# EAGLE board esquema_sgps (EAGLE 5.11)
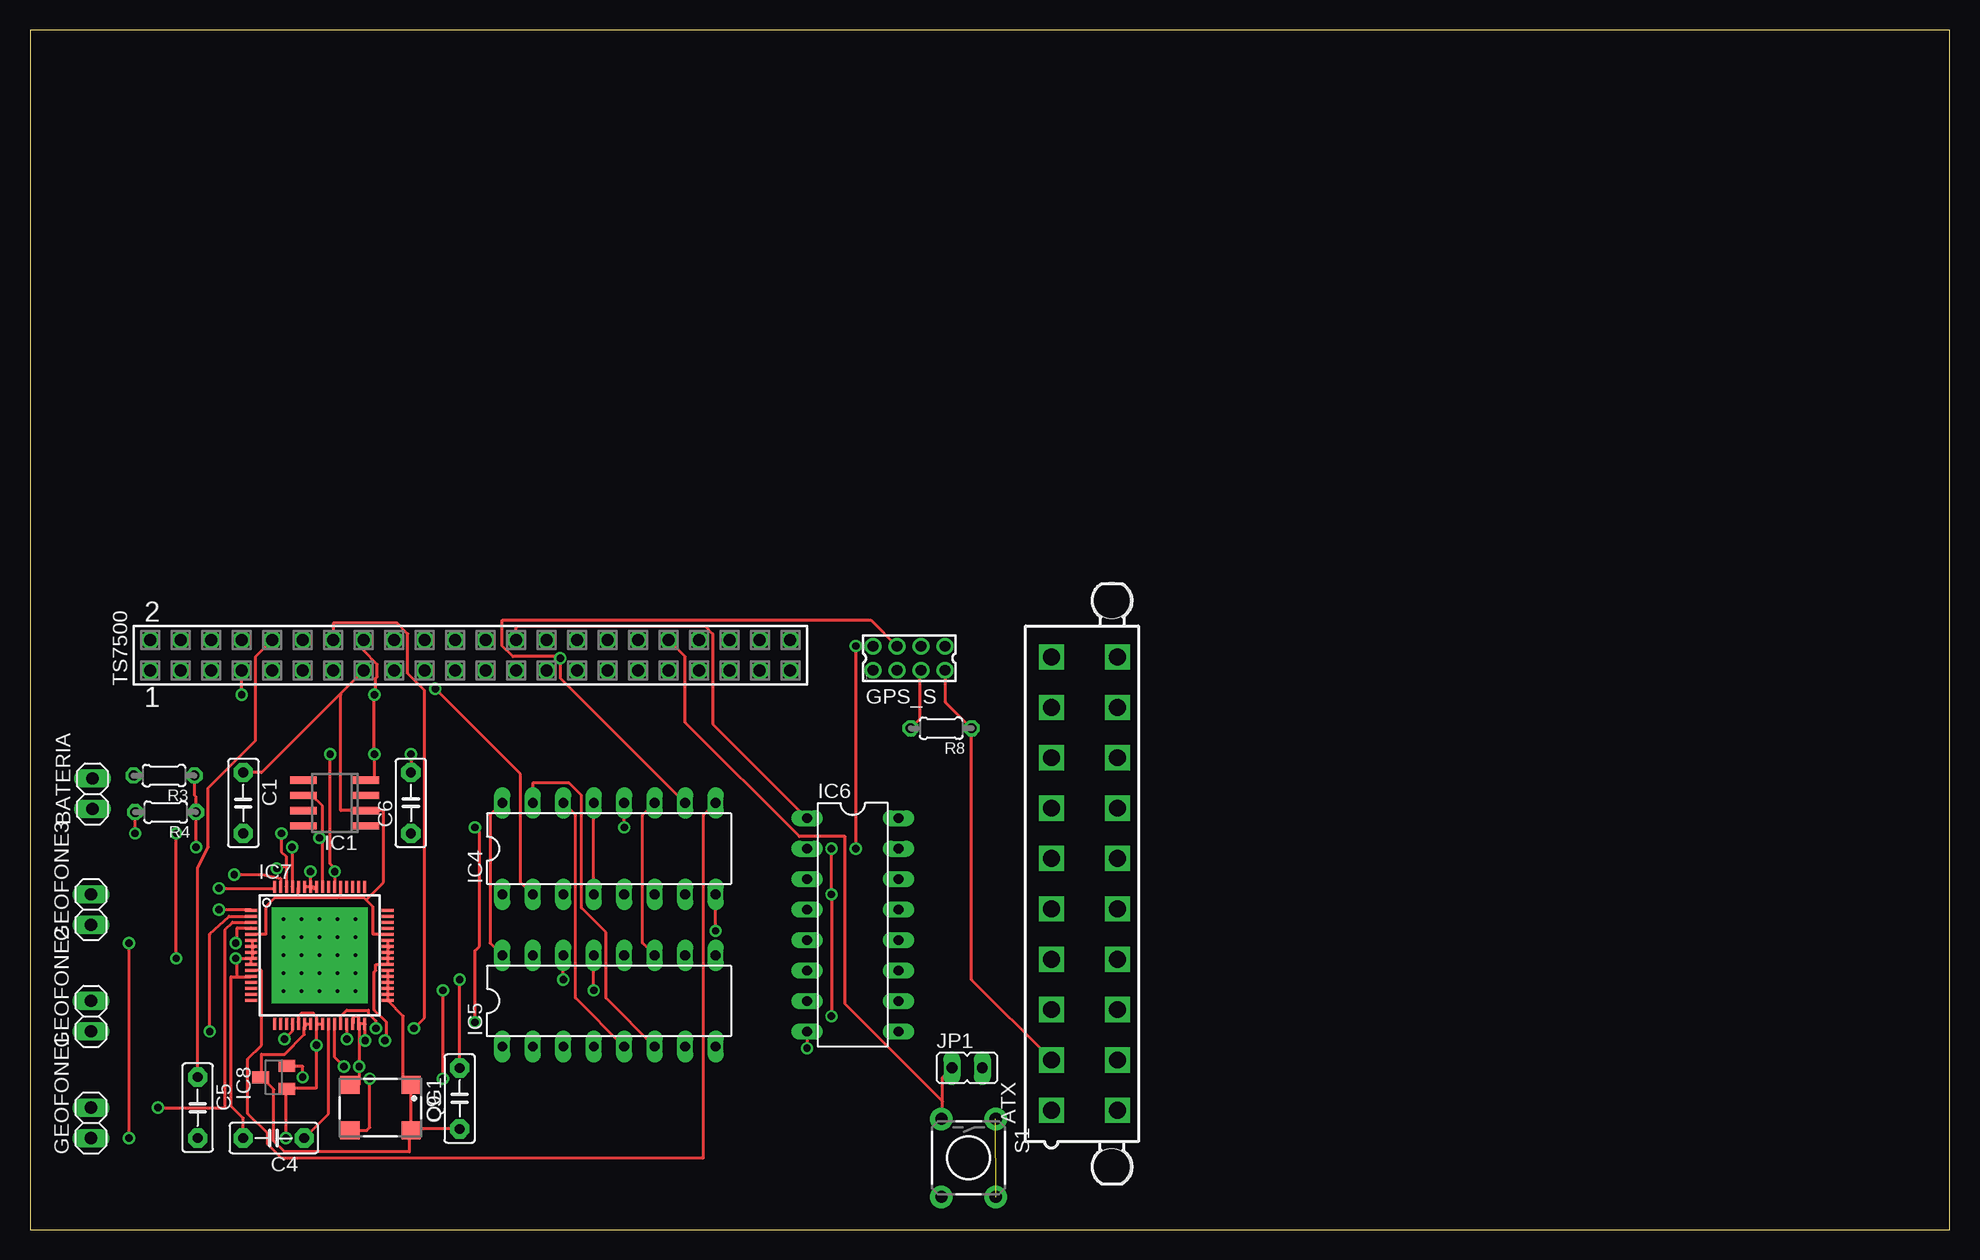
[diagram p0: board, top side]
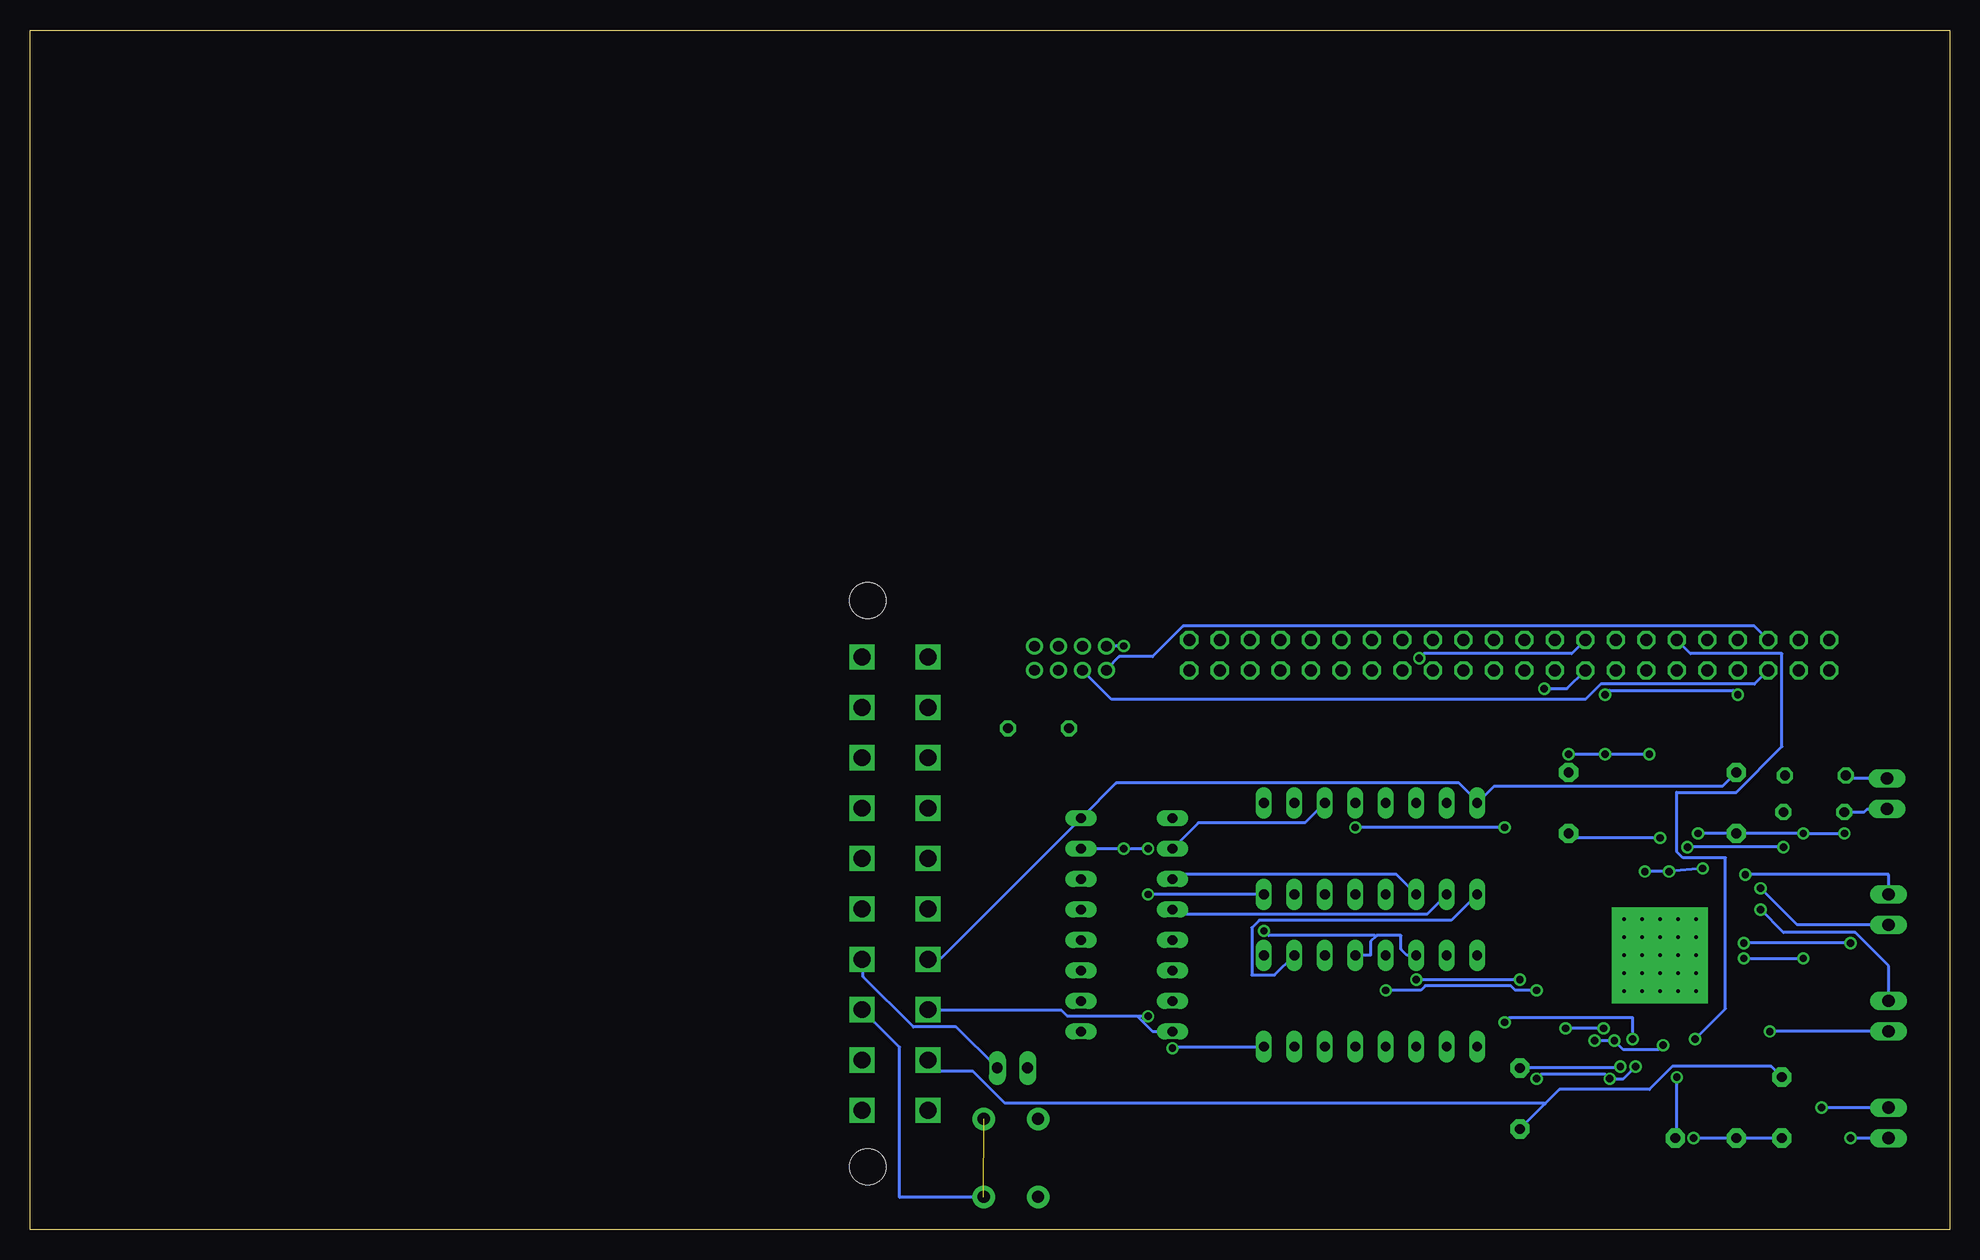
[diagram p1: board, bottom side, seen from below]

Size 160 x 100 mm. Coordinates in mm from the lower left corner, seen from the top.
Outline: 0,0 160,0 160,100 0,100 0,0
Copper layers (1*16): Top 0.035mm / dielectric 1.5mm / Bottom 0.035mm
Design rules "default": minimum track width 10mil, minimum drill 24mil, track to track 8mil, track to pad 8mil, pad to pad 8mil, via to via 8mil, smd to smd 8mil, copper to edge 40mil, drill to drill 8mil, minimum pad ring 10mil, minimum via ring 8mil, stop-mask expansion 4mil, vias tented up to drill 0mil, thermal gap 10mil

## Footprints (pad centres in the part's own frame; a part is rotated, then mirrored left to right if it is on the bottom)
5566-20 = drill 1.4 square: 1 18.9,-2.75; 2 14.7,-2.75; 3 10.5,-2.75; 4 6.3,-2.75; 5 2.1,-2.75; 6 -2.1,-2.75; 7 -6.3,-2.75; 8 -10.5,-2.75; 9 -14.7,-2.75; 10 -18.9,-2.75; 11 18.9,2.75; 12 14.7,2.75; 13 10.5,2.75; 14 6.3,2.75; 15 2.1,2.75; 16 -2.1,2.75; 17 -6.3,2.75; 18 -10.5,2.75; 19 -14.7,2.75; 20 -18.9,2.75 | hole 3: 23.6,2.29; -23.6,2.29
1X02 = drill 1.016 long: 1 -1.27,0; 2 1.27,0
C5B2.5 = drill 0.813 pad 1.6 octagon: 1 -2.54,0; 2 2.54,0
87758-0816 = drill 0.9 pad 1.27 round: 1 -3,-1; 2 -3,1; 3 -1,-1; 4 -1,1; 5 1,-1; 6 1,1; 7 3,-1; 8 3,1
SO08 = smd 0.6 x 2.2: 1 -1.905,-2.6; 2 -0.635,-2.6; 3 0.635,-2.6; 4 1.905,-2.6; 5 1.905,2.6; 6 0.635,2.6; 7 -0.635,2.6; 8 -1.905,2.6
DIL16 = drill 0.813 long: 1 -8.89,-3.81; 2 -6.35,-3.81; 3 -3.81,-3.81; 4 -1.27,-3.81; 5 1.27,-3.81; 6 3.81,-3.81; 7 6.35,-3.81; 8 8.89,-3.81; 9 8.89,3.81; 10 6.35,3.81; 11 3.81,3.81; 12 1.27,3.81; 13 -1.27,3.81; 14 -3.81,3.81; 15 -6.35,3.81; 16 -8.89,3.81
HTQFP-64-PAP = smd 1 x 0.25: 1 -5.7,3.75; 2 -5.7,3.25; 3 -5.7,2.75; 4 -5.7,2.25; 5 -5.7,1.75; 6 -5.7,1.25; 7 -5.7,0.75; 8 -5.7,0.25; 9 -5.7,-0.25; 10 -5.7,-0.75; 11 -5.7,-1.25; 12 -5.7,-1.75; 13 -5.7,-2.25; 14 -5.7,-2.75; 15 -5.7,-3.25; 16 -5.7,-3.75; 33 5.7,-3.75; 34 5.7,-3.25; 35 5.7,-2.75; 36 5.7,-2.25; 37 5.7,-1.75; 38 5.7,-1.25; 39 5.7,-0.75; 40 5.7,-0.25; 41 5.7,0.25; 42 5.7,0.75; 43 5.7,1.25; 44 5.7,1.75; 45 5.7,2.25; 46 5.7,2.75; 47 5.7,3.25; 48 5.7,3.75 | smd 0.25 x 1: 17 -3.75,-5.7; 18 -3.25,-5.7; 19 -2.75,-5.7; 20 -2.25,-5.7; 21 -1.75,-5.7; 22 -1.25,-5.7; 23 -0.75,-5.7; 24 -0.25,-5.7; 25 0.25,-5.7; 26 0.75,-5.7; 27 1.25,-5.7; 28 1.75,-5.7; 29 2.25,-5.7; 30 2.75,-5.7; 31 3.25,-5.7; 32 3.75,-5.7; 49 3.75,5.7; 50 3.25,5.7; 51 2.75,5.7; 52 2.25,5.7; 53 1.75,5.7; 54 1.25,5.7; 55 0.75,5.7; 56 0.25,5.7; 57 -0.25,5.7; 58 -0.75,5.7; 59 -1.25,5.7; 60 -1.75,5.7; 61 -2.25,5.7; 62 -2.75,5.7; 63 -3.25,5.7; 64 -3.75,5.7 | drill 0.3 pad 2 square: EXP1 -3,3; EXP2 -1.5,3; EXP3 0,3; EXP4 1.5,3; EXP5 3,3; EXP6 -3,1.5; EXP7 -1.5,1.5; EXP8 0,1.5; EXP9 1.5,1.5; EXP10 3,1.5; EXP11 -3,0; EXP12 -1.5,0; EXP13 0,0; EXP14 1.5,0; EXP15 3,0; EXP16 -3,-1.5; EXP17 -1.5,-1.5; EXP18 0,-1.5; EXP19 1.5,-1.5; EXP20 3,-1.5; EXP21 -3,-3; EXP22 -1.5,-3; EXP23 0,-3; EXP24 1.5,-3; EXP25 3,-3
SOT23 = smd 1 x 1.4: 1 -0.95,-1.1; 2 0.95,-1.1; 3 0,1.1
JP1 = drill 0.914 long: 1 0,-1.27; 2 0,1.27
SM77H = smd 1.6 x 1.5: 1 -2.55,-1.9; 2 2.55,-1.9; 3 2.55,1.9; 4 -2.55,1.9
0204/5 = drill 0.813 octagon: 1 -2.54,0; 2 2.54,0
TACTILE-PTH = drill 1.016 pad 1.88 round: 1 -3.251,2.261; 2 3.251,2.261; 3 -3.251,-2.261; 4 3.251,-2.261
SSW-122-02-S-D = drill 1 pad 1.5 octagon: 1 -26.67,-1.27; 2 -26.67,1.27; 3 -24.13,-1.27; 4 -24.13,1.27; 5 -21.59,-1.27; 6 -21.59,1.27; 7 -19.05,-1.27; 8 -19.05,1.27; 9 -16.51,-1.27; 10 -16.51,1.27; 11 -13.97,-1.27; 12 -13.97,1.27; 13 -11.43,-1.27; 14 -11.43,1.27; 15 -8.89,-1.27; 16 -8.89,1.27; 17 -6.35,-1.27; 18 -6.35,1.27; 19 -3.81,-1.27; 20 -3.81,1.27; 21 -1.27,-1.27; 22 -1.27,1.27; 23 1.27,-1.27; 24 1.27,1.27; 25 3.81,-1.27; 26 3.81,1.27; 27 6.35,-1.27; 28 6.35,1.27; 29 8.89,-1.27; 30 8.89,1.27; 31 11.43,-1.27; 32 11.43,1.27; 33 13.97,-1.27; 34 13.97,1.27; 35 16.51,-1.27; 36 16.51,1.27; 37 19.05,-1.27; 38 19.05,1.27; 39 21.59,-1.27; 40 21.59,1.27; 41 24.13,-1.27; 42 24.13,1.27; 43 26.67,-1.27; 44 26.67,1.27

## Placement (x,y rotation side)
ATX  5566-20  [5566-20]  87.88,28.83 270 top
BATERIA  [1X02]  5.21,36.32 90 top
C1  1uF  [C5B2.5]  17.78,35.56 270 top
C4  10uF  [C5B2.5]  20.32,7.62 180 top
C5  10uF  [C5B2.5]  13.97,10.16 270 top
C6  10uF  [C5B2.5]  31.75,35.56 90 top
C9  0.1uF  [C5B2.5]  35.81,10.92 90 top
GEOFONE1  [1X02]  5.08,8.89 90 top
GEOFONE2  [1X02]  5.08,17.78 90 top
GEOFONE3  [1X02]  5.08,26.67 90 top
GPS_S  87758-0816  [87758-0816]  73.28,47.62 0 top
IC1  REF02D  [SO08]  25.4,35.56 90 top
IC4  4572N  [DIL16]  48.26,31.75 0 top
IC5  74AC590N  [DIL16]  48.26,19.05 0 top
IC6  74LS157N  [DIL16]  68.58,25.4 270 top
IC7  ADS1278  [HTQFP-64-PAP]  24.13,22.86 0 top
IC8  [SOT23]  20.32,12.7 90 top
JP1  [JP1]  78.11,13.46 270 top
QG1  SM77H  [SM77H]  29.21,10.16 180 top
R3  5k  [0204/5]  11.18,37.85 180 top
R4  1k  [0204/5]  11.3,34.8 180 top
R8  100k  [0204/5]  75.95,41.78 180 top
S1  SWITCH-MOMENTARY-2PTH  [TACTILE-PTH]  78.23,5.97 270 top
TS7500  SSW-122-02-S-D  [SSW-122-02-S-D]  36.7,47.88 0 top

## Library data of the parts
ATX = con-molex; OC_FARNELL: unknown; OC_NEWARK: unknown
BATERIA GEOFONE1-GEOFONE3 = pinhead
C1 C4-C6 C9 = capacitor-wima
GPS_S = con-molex; MF: MOLEX; MPN: 87758-0816; OC_FARNELL: 7472331; OC_NEWARK: 59J1556
IC1 = linear
IC4 = 45xx
IC5 IC6 = 74xx-eu
IC7 = texas; MPN: ADS1278IPAPT; OC_FARNELL: 1603419; OC_NEWARK: 50M8811
IC8 = v-reg
JP1 = jumper
QG1 = crystal; OC_FARNELL: unknown; OC_NEWARK: unknown
R3 R4 = rcl
R8 = resistor
S1 = SparkFun
TS7500 = con-samtec; MPN: SSW-122-02-S-D; OC_FARNELL: unknown; OC_NEWARK: 11P9673

## Nets
2.5V: C6.1 IC1.6 IC7.56
+1V8: C4.1 IC7.26 IC8.2
+3V3: ATX.2 C5.1 C9.1 GPS_S.7 IC7.22 IC7.23 IC7.33 IC7.34 IC7.35 IC7.36 IC7.37 IC7.38 IC8.3 QG1.1 QG1.4 R8.1 TS7500.10
+5V: ATX.4 C1.1 IC1.2 IC4.16 IC5.16 IC6.16 IC7.5 IC7.44 IC7.53 IC7.60 TS7500.15
ADC_DATA: IC7.20 TS7500.12
CONT_144: IC4.3 IC6.3
CONT_RST: IC4.1 IC5.10
DR_INT: IC4.2 IC6.4 TS7500.17
FIRST_ADC_INT: IC4.11 IC5.11 IC6.2
GND: ATX.3 BATERIA.1 C1.2 C4.2 C5.2 C6.2 C9.2 GPS_S.2 IC1.4 IC4.8 IC5.8 IC5.12 IC5.14 IC6.8 IC6.15 IC7.6 IC7.7 IC7.8 IC7.9 IC7.10 IC7.12 IC7.21 IC7.24 IC7.25 IC7.30 IC7.31 IC7.32 IC7.39 IC7.40 IC7.41 IC7.42 IC7.43 IC7.54 IC7.57 IC7.58 IC7.59 IC7.62 IC8.1 QG1.2 R4.2 TS7500.7 TS7500.16
GPS_PPS: GPS_S.4 IC4.10 TS7500.18
N$1: IC6.1 TS7500.26
N$2: IC4.15 IC5.6
N$3: IC4.14 IC5.5
N$4: IC4.9 IC7.11
N$5: IC4.4 IC4.13
N$6: JP1.1 S1.3 TS7500.36
N$7: IC4.12 IC7.29
N$8: GEOFONE1.2 IC7.3
N$9: ATX.14 JP1.2
N$10: GEOFONE1.1 IC7.4
N$11: GEOFONE2.2 IC7.1
N$12: IC7.61 R3.1 R4.1
N$13: ATX.13 S1.1
N$14: GEOFONE3.2 IC7.63
N$15: GEOFONE3.1 IC7.64
N$17: IC5.13 IC7.27 QG1.3
N$19: BATERIA.2 R3.2
N$42: GPS_S.1 TS7500.6
N$43: GPS_S.3 TS7500.5
N$44: GPS_S.5 R8.2
N$46: GEOFONE2.1 IC7.2
SPI_CLOCK: IC7.28 TS7500.14

## Tracks (layer width: path | path; a pad name or v marks a point on that pad's centre or on a via)
2.5V  (via drill 0.61)
  Top 0.254: 24.38,32.64 24.38,35.31 23.5,36.2 IC1.6 | 24.38,32.64 24.38,28.57 IC7.56 | 24.38,32.64 v24.13,32.64
  Bottom 0.254: C6.1 31.37,32.64 v24.13,32.64
+1V8  (via drill 0.61)
  Top 0.254: C4.1 24.89,9.65 24.89,17.14 IC7.26 | v22.73,12.7 22.73,13.59 21.46,13.59 IC8.2
  Bottom 0.254: v22.73,12.7 22.73,7.62 C4.1
+3V3
  Top 0.254: QG1.4 31.77,8.31 | QG1.1 31.77,12.04 | GPS_S.7 76.33,46.61 76.33,43.94 R8.1 78.49,20.83 85.09,14.22 ATX.2 | IC7.23 23.37,17.14 22.99,17.14 IC7.22 22.99,17.02 22.86,16.89 22.86,16.26 21.21,14.61 19.3,14.61 19.3,12.7 | IC7.38 29.84,21.59 29.84,21.21 IC7.37 29.84,21.08 29.84,20.7 IC7.36 29.84,20.57 29.84,20.19 IC7.35 29.84,20.07 29.84,19.68 IC7.34 29.84,19.56 29.84,19.18 IC7.33 29.84,19.05 31.11,17.78 31.11,12.7 QG1.1 | QG1.4 31.75,8.38 31.75,11.94 QG1.1 | C9.1 31.88,8.38 QG1.4 | 19.3,12.7 20.32,11.68 20.32,7.37 21.21,6.48 31.62,6.48 31.62,8.38 QG1.4 | 19.3,12.7 IC8.3 | TS7500.10 18.8,47.75 18.8,40.77 14.86,36.83 14.86,31.88 13.97,30.1 C5.1
  Bottom 0.254: 33.72,10.48 32.51,11.68 25.02,11.68 23.11,13.59 14.86,13.59 C5.1 | 33.72,10.48 C9.1 | ATX.2 85.09,14.1 84.2,13.21 81.41,13.21 78.74,10.54 33.78,10.54 33.72,10.48
+5V
  Top 0.254: 22.35,27.69 20.45,27.69 19.68,26.92 19.68,24.64 18.54,24.64 IC7.5 | 22.35,27.69 22.35,28.45 IC7.60 | 25.72,27.75 25.65,27.69 22.35,27.69 | 25.72,27.75 25.91,27.94 25.91,28.45 IC7.53 | 28,27.5 27.81,27.69 25.78,27.69 25.72,27.75 | 28,27.5 28.57,26.92 28.57,24.64 29.72,24.64 IC7.44 | 28,27.5 29.46,28.96 29.46,34.92 IC1.2 25.91,34.92 25.91,44.58 25.84,44.64 | IC5.16 38.35,23.88 38.35,34.54 IC4.16 | 25.84,44.64 19.3,38.1 C1.1 | 25.84,44.64 TS7500.15
  Bottom 0.254: ATX.4 85.09,22.61 84.07,22.61 IC6.16 69.47,37.21 40.89,37.21 39.37,35.69 IC4.16 37.97,36.96 18.92,36.96 C1.1
ADC_DATA  (via drill 0.61)
  Top 0.254: v21.21,15.88 21.84,16.51 21.84,17.14 IC7.20
  Bottom 0.254: v21.21,15.88 18.67,18.41 18.67,30.99 22.23,30.99 22.73,31.5 22.73,36.45 17.78,36.45 13.97,40.26 13.97,48.01 21.59,48.01 TS7500.12
CONT_144
  Bottom 0.254: IC4.3 46.1,29.59 64.39,29.59 IC6.3
CONT_RST
  Bottom 0.254: IC4.1 41.53,25.78 57.53,25.78 58.17,25.15 58.17,21.21 56.26,21.21 IC5.10
DR_INT  (via drill 0.61)
  Top 0.254: v33.78,45.09 40.89,37.97 40.89,28.96 IC4.2
  Bottom 0.254: IC4.2 43.56,26.29 64.39,26.29 IC6.4 | TS7500.17 31.88,45.09 v33.78,45.09
FIRST_ADC_INT
  Top 0.254: IC5.11 51.05,23.88 51.05,34.54 IC4.11
  Bottom 0.254: IC6.2 62.61,33.91 53.72,33.91 IC4.11
GND  (via drill 0.61)
  Top 0.254: 23.37,28.7 23.24,28.57 22.99,28.57 IC7.59 | 23.37,28.7 23.5,28.57 | 23.5,28.57 IC7.58 23.37,28.7 | IC7.57 23.88,28.45 23.62,28.45 23.62,28.57 23.5,28.57 | v23.37,29.84 23.37,28.7 | IC7.54 25.4,28.57 v25.4,29.84 25.4,30.1 25.02,30.48 v25.02,39.62 | 21.34,30.23 21.34,31.11 20.95,31.5 v20.95,33.02 | 21.34,30.23 21.34,28.57 IC7.62 | 21.34,30.23 v20.57,30.1 | v8.76,33.02 R4.2 | v31.75,39.62 C6.2 | IC1.4 28.7,37.47 v28.7,39.62 v28.7,44.58 28.83,44.7 28.83,45.97 28.96,46.1 28.96,47.12 27.81,48.26 TS7500.16 | v17.65,44.58 TS7500.7 | 17.27,21.08 18.41,21.08 IC7.12 | 17.27,21.08 17.27,22.48 17.34,22.54 | 17.34,22.54 17.4,22.61 18.41,22.61 | 18.41,22.61 IC7.9 18.54,22.73 18.54,22.99 IC7.8 18.67,22.99 18.67,23.11 18.54,23.24 18.54,23.5 IC7.7 18.67,23.5 18.67,23.62 18.54,23.75 18.54,24 IC7.6 | IC7.10 18.41,22.23 18.41,22.61 | v21.34,7.62 21.34,11.68 IC8.1 21.46,11.81 23.88,11.81 v23.88,15.37 23.88,17.14 IC7.24 | 17.27,21.08 16.76,21.08 16.76,10.29 17.78,9.27 C4.2 | IC7.21 22.35,17.27 22.35,17.78 22.61,18.03 23.62,18.03 23.88,17.78 23.88,17.27 IC7.24 | IC7.25 24.26,17.14 24,17.14 IC7.24 | 29.84,22.73 29.97,22.61 29.84,22.48 29.84,22.23 IC7.39 29.72,22.1 28.83,22.1 28.83,21.59 28.7,21.46 28.7,18.29 29.72,17.27 29.72,15.88 v29.59,15.75 | 29.84,22.73 IC7.40 | 29.84,22.73 29.84,22.99 IC7.41 29.97,22.99 29.97,23.11 29.84,23.24 29.84,23.5 IC7.42 29.97,23.5 29.97,23.62 29.84,23.75 29.84,24 IC7.43 | 27.43,17.14 v27.43,13.59 27.43,12.06 QG1.2 | 27.43,17.14 IC7.31 27.43,17.27 27.43,17.78 27.05,17.78 26.92,17.65 26.92,17.27 IC7.30 | 27.43,17.14 27.81,17.14 IC7.32 27.94,17.14 v27.94,15.75
  Top 0.254: IC6.8 v64.77,15.11 | v57.15,24.89 IC4.8 | v66.8,31.75 v66.8,27.94 v66.8,17.78 | v68.83,31.75 v68.83,48.64 | C9.2 v35.81,20.83 | v44.45,20.83 IC5.14 | v12.19,22.61 v12.19,33.02 | v17.14,22.61 17.27,22.61 17.34,22.54
  Bottom 0.254: R4.2 7.11,34.8 6.86,35.05 BATERIA.1 | v25.4,29.84 v23.37,29.84 v20.57,30.1 | v20.95,33.02 C1.2 v12.19,33.02 v8.76,33.02 | v31.75,39.62 v28.7,39.62 v25.02,39.62 | v17.65,44.58 18.03,44.96 28.32,44.96 v28.7,44.58 | v21.34,7.62 C4.2 C5.2 | v29.59,15.75 v27.94,15.75 27.18,14.99 24.26,14.99 v23.88,15.37 | C9.2 27.56,13.46 v27.43,13.59 | IC5.8 64.64,15.24 v64.77,15.11 | 67.63,17.72 66.42,16.51 IC6.8 | 67.63,17.72 67.69,17.78 73.53,17.78 74.04,18.29 85.09,18.29 ATX.3 | IC5.14 45.21,22.86 45.72,23.37 45.72,24.51 47.75,24.51 47.82,24.45 | 47.82,24.45 48.26,24 48.26,22.86 IC5.12 | v57.15,24.89 56.77,24.51 47.88,24.51 47.82,24.45 | v66.8,31.75 v68.83,31.75 IC6.15 | IC4.8 v66.8,27.94 | v68.83,48.64 70.23,48.64 GPS_S.2 | v66.8,17.78 67.56,17.78 67.63,17.72 | v35.81,20.83 v44.45,20.83 | v17.14,22.61 v12.19,22.61
GPS_PPS  (via drill 0.61)
  Top 0.254: IC4.10 44.2,45.97 v44.2,47.62 44.2,47.75 40.26,47.75 39.37,48.64 39.37,50.8 70.1,50.8 GPS_S.4
  Bottom 0.254: v44.2,47.62 43.81,48.01 31.5,48.01 TS7500.18
N$1
  Top 0.254: IC6.1 56.9,42.16 56.9,49.66 56.26,50.29 40.51,50.29 TS7500.26
N$2
  Top 0.254: IC5.6 48.01,19.3 48.01,24.77 45.97,26.8 45.97,36.2 44.96,37.21 41.91,37.21 IC4.15
N$3
  Top 0.254: IC5.5 45.47,19.3 45.47,34.54 IC4.14
N$4
  Top 0.254: IC4.9 56.13,34.54 56.13,5.97 20.95,5.97 19.81,7.11 19.81,8 18.16,9.65 18.16,14.22 19.3,15.37 19.3,21.59 18.54,21.59 IC7.11
N$5
  Top 0.254: IC4.4 IC4.13
N$6
  Top 0.254: JP1.1 76.07,12.7 76.07,10.67 | 76.07,10.67 76.07,9.27 S1.3 | TS7500.36 54.61,47.75 54.61,42.29 64.14,32.77 67.94,32.77 67.94,18.8 76.07,10.67
N$7  (via drill 0.61)
  Top 0.254: v26.42,15.88 26.42,17.14 IC7.29 | v37.08,17.27 37.08,23.24 37.47,23.62 37.47,33.15 v37.08,33.53 | v49.53,33.53 IC4.12
  Bottom 0.254: v26.42,15.88 26.42,17.65 36.7,17.65 v37.08,17.27 | v37.08,33.53 v49.53,33.53
N$8  (via drill 0.61 pad 0.25)
  Top 0.254: v10.67,10.16 16.26,10.16 16.26,25.02 16.89,25.61 IC7.3
  Bottom 0.254: GEOFONE1.2 v10.67,10.16
N$9
  Bottom 0.254: JP1.2 82.8,16.89 86.36,16.89 90.55,21.08 90.55,22.48 ATX.14
N$10  (via drill 0.61)
  Top 0.254: v17.14,23.88 17.27,24 17.27,25.15 18.41,25.15 IC7.4 | v8.26,7.62 v8.26,23.88
  Bottom 0.254: v8.26,23.88 v17.14,23.88 | GEOFONE1.1 v8.26,7.62
N$11  (via drill 0.61)
  Top 0.254: v15.75,26.67 18.41,26.67 IC7.1
  Bottom 0.254: v15.75,26.67 13.84,24.77 7.87,24.77 5.08,21.97 GEOFONE2.2
N$12  (via drill 0.61)
  Top 0.254: v21.84,31.88 21.84,28.57 IC7.61 | v13.84,31.88 R4.1 13.84,36.07 13.72,36.2 R3.1
  Bottom 0.254: v13.84,31.88 v21.84,31.88
N$13  (1 unrouted)
  Bottom 0.254: ATX.13 87.5,15.2 87.5,2.67 80.52,2.67
N$14  (via drill 0.61 pad 0.25)
  Top 0.254: v17.02,29.59 19.3,29.59 20.88,29.29 IC7.63
  Bottom 0.254: GEOFONE3.2 5.08,29.59 v17.02,29.59
N$15  (via drill 0.61)
  Top 0.254: v15.75,28.45 20.32,28.45 IC7.64
  Bottom 0.254: v15.75,28.45 12.7,25.4 GEOFONE3.1
N$17  (via drill 0.61)
  Top 0.254: v26.16,13.59 25.4,14.35 25.4,17.14 IC7.27 | v28.32,12.57 28.32,8.51 28.07,8.26 QG1.3 | v46.99,19.94 IC5.13 | v34.42,12.57 v34.42,19.94
  Bottom 0.254: v26.16,13.59 27.18,12.57 v28.32,12.57 28.7,12.95 34.04,12.95 v34.42,12.57 | v46.99,19.94 44.07,19.94 43.69,20.32 36.58,20.32 36.2,19.94 v34.42,19.94
N$19
  Bottom 0.254: R3.2 8.38,37.59 BATERIA.2
N$42
  Bottom 0.254: TS7500.6 16.26,50.29 63.88,50.29 66.42,47.75 69.22,47.75 70.23,46.74 GPS_S.1
N$43
  Bottom 0.254: TS7500.5 16.26,45.47 29.08,45.47 30.35,44.2 69.85,44.2 GPS_S.3
N$44
  Top 0.254: R8.2 74.17,42.55 74.17,46.61 GPS_S.5
N$46  (via drill 0.61 pad 0.25)
  Top 0.254: v14.99,16.51 14.99,24.64 16.59,26.11 IC7.2
  Bottom 0.254: GEOFONE2.1 v14.99,16.51
SPI_CLOCK  (via drill 0.61)
  Top 0.254: v28.83,16.76 28.83,17.4 28.19,18.03 28.19,18.29 26.42,18.29 25.91,17.78 25.91,17.27 IC7.28 | v32,16.76 32.89,17.65 32.89,44.96 31.5,46.35 31.5,49.66 30.61,50.55 25.27,50.55 TS7500.14
  Bottom 0.254: v28.83,16.76 v32,16.76